# Altium PCB PCB_dual.PcbDoc
Units mm, origin at the board's own origin, x right, y up, seen from the top; angles counter-clockwise.
Board outline 73.03 x 27.43 mm, 2 copper layers (Top Layer, Bottom Layer); 8 components, 15 nets, 40 pads, 16 vias.
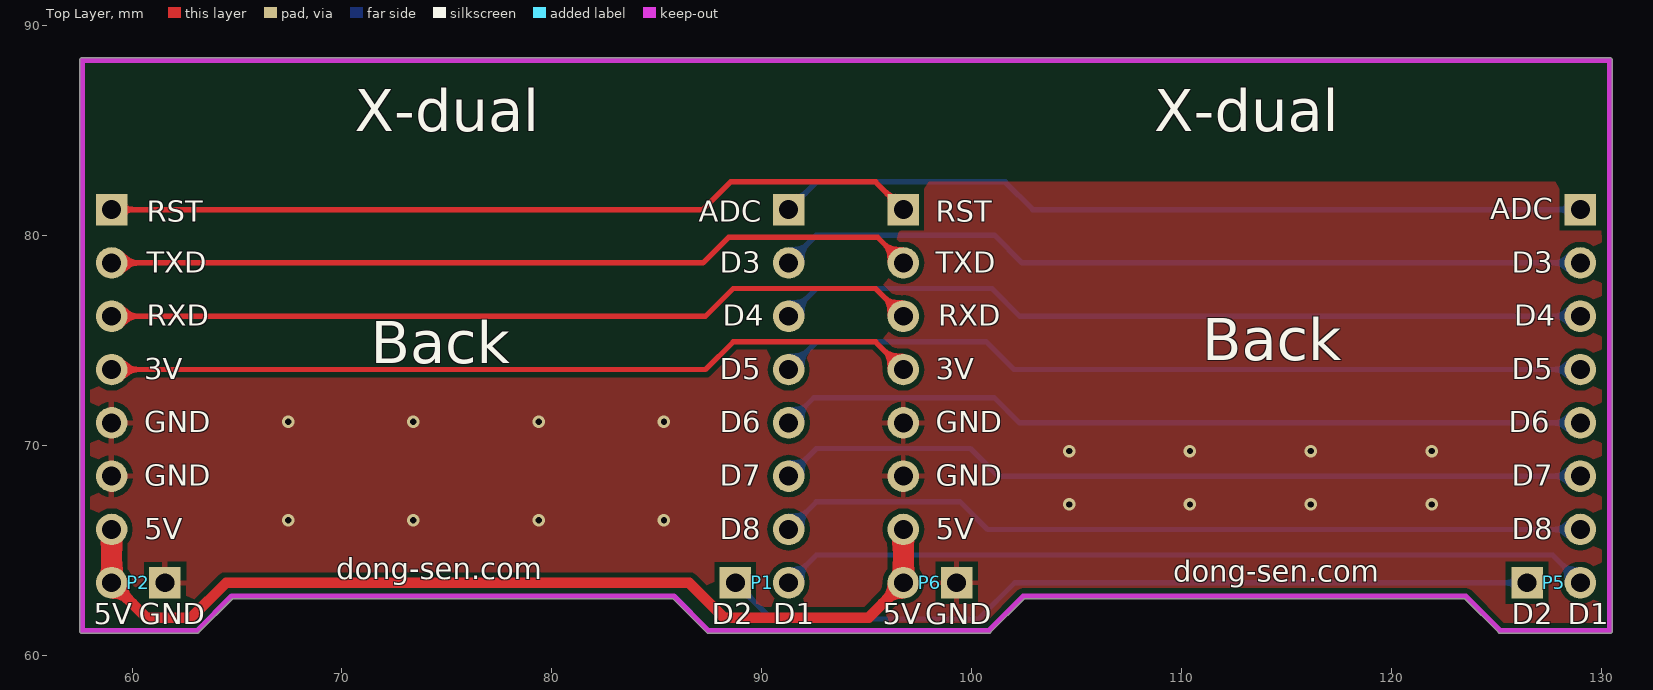
[diagram p0: Top Layer view]
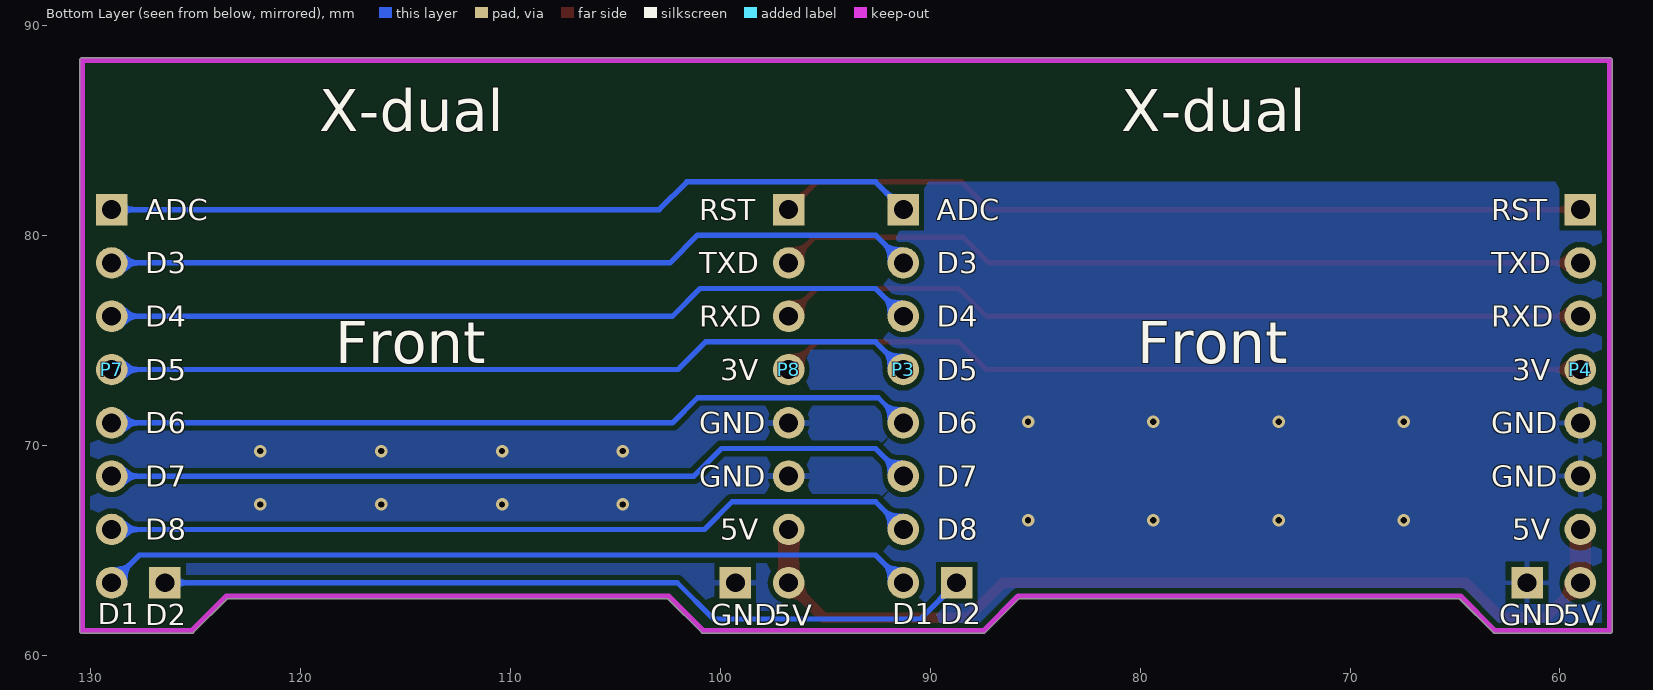
[diagram p1: Bottom Layer view, seen from below]

## Layer stack, top to bottom
Top Solder: solder mask 0.0102, Solder Resist, Dk 3.5
Top Layer: signal copper 0.0356
Dielectric 1: dielectric 0.32, FR-4, Dk 4.8
Bottom Layer: signal copper 0.0356
Bottom Solder: solder mask 0.0102, Solder Resist, Dk 3.5

## Board outline
57.633,61.036 63.094,61.036 ccw(c63.094,61.163) 63.184,61.074 63.184,61.073 64.797,62.687 85.774,62.687 87.388,61.073 87.387,61.074 ccw(c87.478,61.163) 87.478,61.036 100.813,61.036 ccw(c100.813,61.163) 100.903,61.074 100.903,61.073 102.516,62.687 123.493,62.687 125.107,61.073 125.106,61.074 ccw(c125.197,61.163) 125.197,61.036 130.404,61.036 ccw(c130.404,61.163) 130.531,61.163 130.531,88.341 ccw(c130.404,88.341) 130.404,88.469 57.633,88.469 ccw(c57.633,88.341) 57.505,88.341 57.505,61.163 ccw(c57.633,61.163)

## Design rules (kind name [scope] priority, off if disabled: settings)
Clearance [All] p1: gap=0.254
PolygonConnect PolygonConnect_isVia [IsVia] p1: connectstyle=Direct reliefconductorwidth=0.254 reliefentries=4 polygonreliefangle="90 Angle" airgapwidth=0.254
PolygonConnect [All] p2: connectstyle=Relief reliefconductorwidth=0.254 reliefentries=4 polygonreliefangle="90 Angle" airgapwidth=0.254
RoutingVias [All] p1: holewidth=0.711 width=1.27 viastyle="Through Hole" minholewidth=0.711 minwidth=1.27 maxholewidth=0.711 maxwidth=1.27
SolderMaskExpansion [All] p1: expansion=0.102
Width [All] p1: maxlimit=1 minlimit=0.254 preferedwidth=0.254
30 further rules are at their usual default settings.

## Components (designator, comment, footprint, x,y, rotation, side; value= is the part's Value field where it differs from the comment)
P1 "Header 2" HDR1X2 88.748,63.449 r0 top
P2 "Header 2" HDR1X2 61.57,63.449 r180 top
P3 "Header 7" HDR1X7 91.288,81.229 r270 bottom
P4 "Header 7" HDR1X7 59.03,81.229 r270 bottom
P5 "Header 2" HDR1X2 126.467,63.449 r0 top
P6 "Header 2" HDR1X2 99.289,63.449 r180 top
P7 "Header 7" HDR1X7 129.007,81.229 r270 bottom
P8 "Header 7" HDR1X7 96.749,81.229 r270 bottom

## Footprints (in the part's own frame and the unit in brackets; to place one, negate y for a bottom-side part, rotate by r counter-clockwise, add the part's x,y. Pads: shape width x height; smd on the part's side, far side on the other; paste and mask are expansions set on the pad)
HDR1X2 [mm] "Connector; Header; 2 Position"
  rect 1.5x1.5 hole 0.9: 1(0,0)
  round 1.5 hole 0.9: 2(2.54,0)
HDR1X7 [mm] "Connector; Header; 7 Position"
  rect 1.5x1.5 hole 0.9: 1(0,0)
  round 1.5 hole 0.9: 2(2.54,0) 3(5.08,0) 4(7.62,0) 5(10.16,0) 6(12.7,0) 7(15.24,0)

## Part data
P1 P2 P5 P6: "Header, 2-Pin"
P3 P4 P7 P8: "Header, 7-Pin"

## Free pads (board coordinates)
  round 3 on Keep-Out: ""(60.173,85.801) ""(90.145,85.801) ""(97.892,85.801) ""(127.864,85.801)

## Via types
v1: diameter 0.6, hole 0.3, Top Layer to Bottom Layer, tented both sides, 16 vias

## Nets (pads, with @x,y where several pads share a name; then routed paths per layer and width w, separated by ;. In a path a pad name is that pad's centre, name@x,y a point inside that pad or via, vN(x,y) a via of type N, cw(c..) or ccw(c..) an arc to the next point about the centre after c; other vN are vias at no path point)
ADC_EX: P3.1 P7.1 | length 38.8
  Bottom Layer w0.254: P3.1 92.608,82.55 101.6,82.55 102.921,81.229 P7.1
GND: P2.1 P4.5 P4.6 P6.1 P8.5 P8.6
  other v1: 67.437,66.421 73.406,66.421 79.375,66.421 85.344,66.421 104.648,67.183 110.405,67.183 116.163,67.183 121.92,67.183 104.648,69.723 110.405,69.723 116.163,69.723 121.92,69.723 67.437,71.12 73.406,71.12 79.375,71.12 85.344,71.12
GPIO0: P3.2 P7.2 | length 38.8
  Bottom Layer w0.254: P3.2 92.608,80.01 101.092,80.01 102.413,78.689 P7.2
GPIO2: P3.3 P7.3 | length 38.8
  Bottom Layer w0.254: P3.3 92.608,77.47 100.965,77.47 102.286,76.149 P7.3
GPIO12: P3.5 P7.5 | length 38.7
  Bottom Layer w0.254: P3.5 92.481,72.263 101.092,72.263 102.286,71.069 P7.5
GPIO13: P3.6 P7.6 | length 38.8
  Bottom Layer w0.254: P3.6 92.608,69.85 99.949,69.85 101.27,68.529 P7.6
GPIO14: P3.4 P7.4 | length 38.8
  Bottom Layer w0.254: P3.4 92.608,74.93 100.711,74.93 102.032,73.609 P7.4
GPIO15: P3.7 P7.7 | length 38.8
  Bottom Layer w0.254: P3.7 92.608,67.31 99.441,67.31 100.762,65.989 P7.7
NRST: P4.1 P8.1 | length 38.8
  Top Layer w0.254: P4.1 87.198,81.229 88.519,82.55 95.428,82.55 P8.1
RXD: P4.3 P8.3 | length 38.8
  Top Layer w0.254: P4.3 87.325,76.149 88.646,77.47 95.428,77.47 P8.3
SCL: P1.1 P5.1 | length 39.1
  Bottom Layer w0.254: P1.1 90.475,61.722 100.33,61.722 102.057,63.449 P5.1
SDA: P1.2 P5.2 | length 38.8
  Bottom Layer w0.254: P1.2 92.608,64.77 127.686,64.77 P5.2
TXD: P4.2 P8.2 | length 38.7
  Top Layer w0.254: P4.2 87.198,78.689 88.417,79.908 95.529,79.908 P8.2
VCC_3V: P4.4 P8.4 | length 38.8
  Top Layer w0.254: P4.4 87.325,73.609 88.646,74.93 95.428,74.93 P8.4
VCC_5V: P2.2 P4.7 P6.2 P8.7 | length 45.5
  Top Layer w0.5: P2.2 60.685,61.794 62.832,61.794 64.483,63.445 86.539,63.445 88.19,61.794 95.094,61.794 P6.2
  Top Layer w1: P2.2 P4.7 ; P6.2 P8.7

## Polygon pours and split planes (outlines as drawn)
GND on Top Layer "Bottom_GND" (solid, remove dead copper, pour order 14): 57.633,82.55 130.277,82.55 130.404,82.677 130.404,61.163 57.633,61.163
GND on Bottom Layer "Bottom_GND" (solid, remove dead copper, pour order 16): 57.633,82.55 130.404,82.55 130.404,61.163 57.633,61.163

## Keep-outs
Keep-Out Layer:
  lines w0.254: 95.352,61.163 100.813,61.163 102.464,62.814 123.546,62.814 125.197,61.163 130.404,61.163 130.404,88.341 95.352,88.341 57.633,88.341 57.633,61.163 63.094,61.163 64.745,62.814 85.827,62.814 87.478,61.163 95.504,61.163

## Silkscreen, mask and mechanical layers (free items; w line width, h text height)
Top Overlay:
  text "X-dual" at 70.612,84.963 h2
  text "X-dual" at 108.712,84.963 h2
  text "ADC" at 124.714,80.772 h1
  text "RST" at 60.706,80.645 h1
  text "ADC" at 86.995,80.645 h1
  text "RST" at 98.298,80.645 h1
  text "TXD" at 60.706,78.232 h1
  text "D3" at 88.011,78.232 h1
  text "TXD" at 98.298,78.232 h1
  text "D3" at 125.73,78.232 h1
  text "RXD" at 60.706,75.692 h1
  text "D4" at 88.138,75.692 h1
  text "RXD" at 98.425,75.692 h1
  text "D4" at 125.857,75.692 h1
  text "Back" at 110.998,74.041 h2
  text "Back" at 71.374,73.914 h2
  text "3V" at 60.579,73.152 h1
  text "D5" at 88.011,73.152 h1
  text "3V" at 98.298,73.152 h1
  text "D5" at 125.73,73.152 h1
  text "GND" at 60.579,70.612 h1
  text "D6" at 88.011,70.612 h1
  text "GND" at 98.298,70.612 h1
  text "D6" at 125.603,70.612 h1
  text "GND" at 60.579,68.072 h1
  text "D7" at 88.011,68.072 h1
  text "GND" at 98.298,68.072 h1
  text "D7" at 125.73,68.072 h1
  text "5V" at 60.579,65.532 h1
  text "D8" at 88.011,65.532 h1
  text "5V" at 98.298,65.532 h1
  text "D8" at 125.73,65.532 h1
  text "dong-sen.com" at 69.723,63.627 h1
  text "dong-sen.com" at 109.601,63.5 h1
  text "5V" at 58.166,61.468 h1
  text "GND" at 60.325,61.468 h1
  text "D2" at 87.63,61.468 h1
  text "D1" at 90.551,61.468 h1
  text "5V" at 95.758,61.468 h1
  text "GND" at 97.79,61.468 h1
  text "D2" at 125.73,61.468 h1
  text "D1" at 128.397,61.468 h1
Bottom Overlay:
  text "X-dual" at 80.899,84.963 h2
  text "X-dual" at 119.126,84.963 h2
  text "RST" at 63.284,80.729 h1
  text "ADC" at 89.687,80.729 h1
  text "RST" at 101.003,80.729 h1
  text "ADC" at 127.406,80.729 h1
  text "TXD" at 63.284,78.189 h1
  text "D3" at 89.687,78.189 h1
  text "TXD" at 101.003,78.189 h1
  text "D3" at 127.406,78.189 h1
  text "RXD" at 63.284,75.649 h1
  text "D4" at 89.687,75.649 h1
  text "RXD" at 101.003,75.649 h1
  text "D4" at 127.406,75.649 h1
  text "Front" at 80.137,73.914 h2
  text "Front" at 118.364,73.914 h2
  text "3V" at 62.284,73.109 h1
  text "D5" at 89.687,73.109 h1
  text "3V" at 100.003,73.109 h1
  text "D5" at 127.406,73.109 h1
  text "GND" at 63.284,70.569 h1
  text "D6" at 89.687,70.569 h1
  text "GND" at 101.003,70.569 h1
  text "D6" at 127.406,70.569 h1
  text "GND" at 63.284,68.029 h1
  text "D7" at 89.687,68.029 h1
  text "GND" at 101.003,68.029 h1
  text "D7" at 127.406,68.029 h1
  text "5V" at 62.284,65.489 h1
  text "D8" at 89.687,65.489 h1
  text "5V" at 100.003,65.489 h1
  text "D8" at 127.406,65.489 h1
  text "D2" at 89.535,61.468 h1
  text "D1" at 91.821,61.468 h1
  text "D1" at 129.667,61.468 h1
  text "GND" at 62.903,61.425 h1
  text "GND" at 100.495,61.425 h1
  text "D2" at 127.406,61.417 h1
  text "5V" at 59.863,61.4 h1
  text "5V" at 97.455,61.4 h1